# Altium PCB ersa_board_a.PcbDoc
Units mm, origin at the board's own origin, x right, y up, seen from the top; angles counter-clockwise.
Board outline 29 x 106.5 mm, 2 copper layers (Top Layer, Bottom Layer); 46 components, 63 nets, 140 pads, 33 vias.
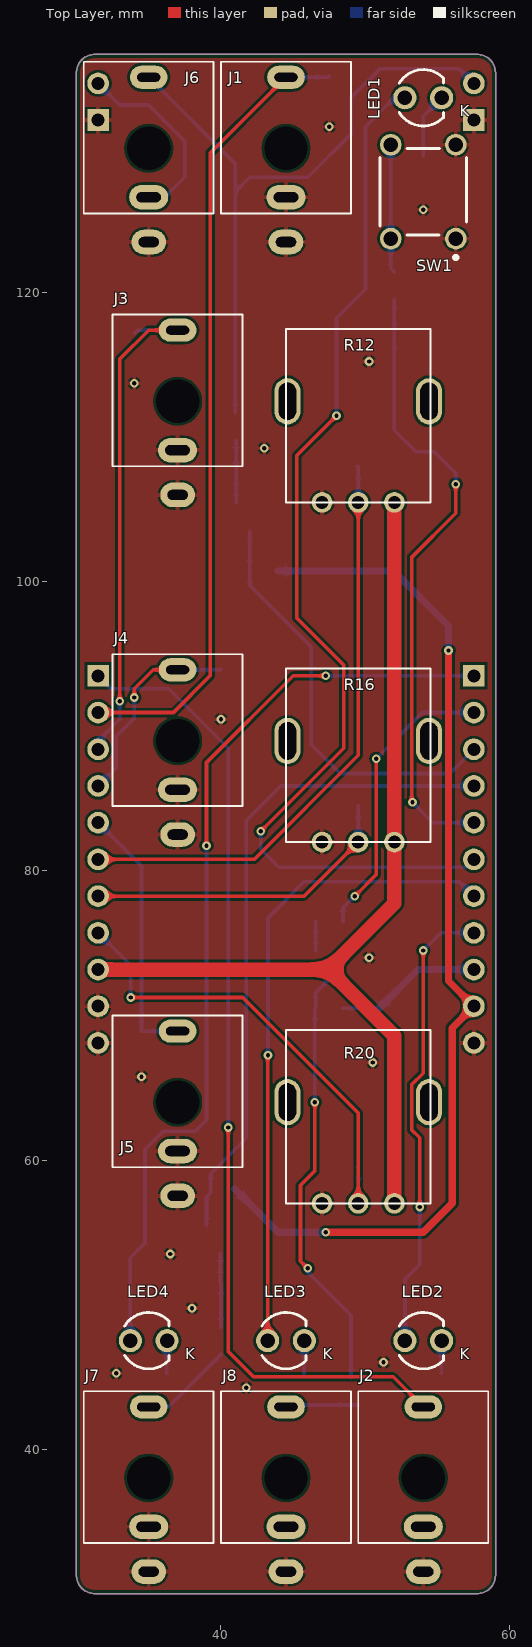
[diagram p0: Top Layer view]
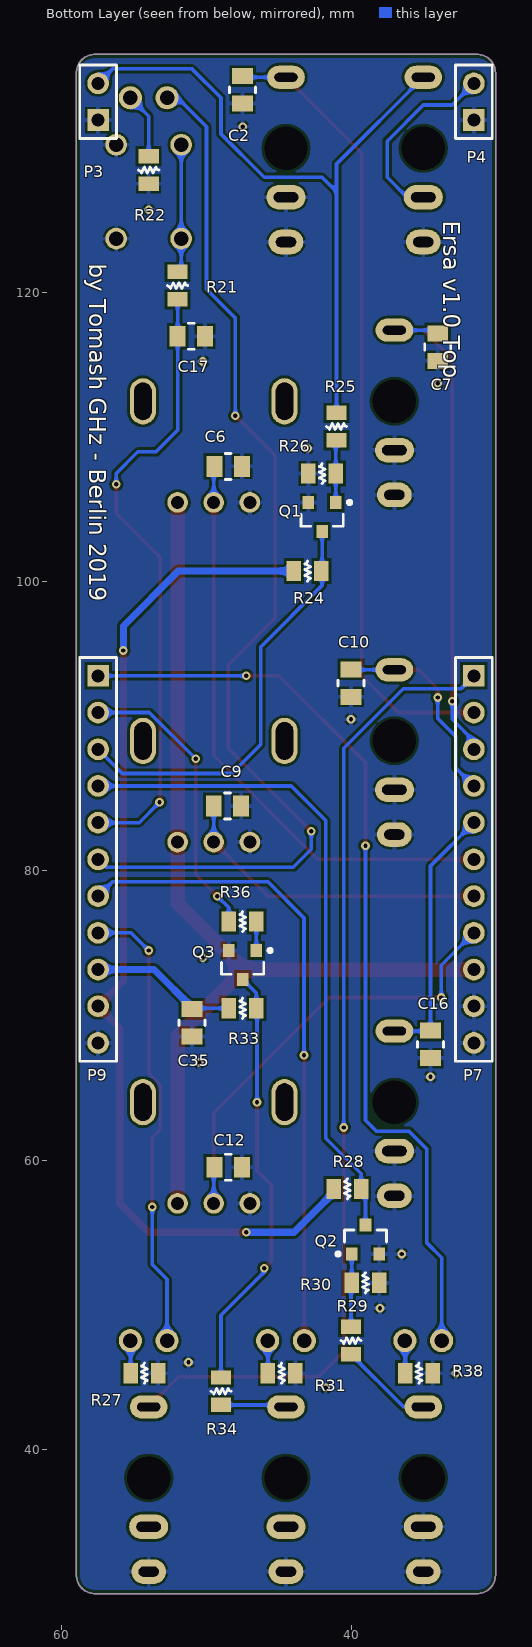
[diagram p1: Bottom Layer view, seen from below]
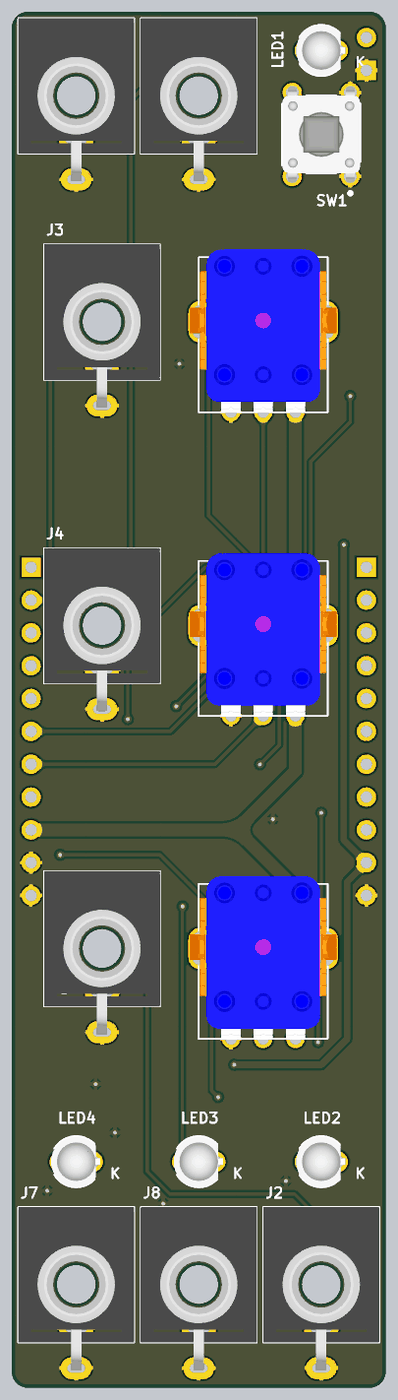
[diagram p2: 3D render of the assembled board from above, using the file's embedded part models]
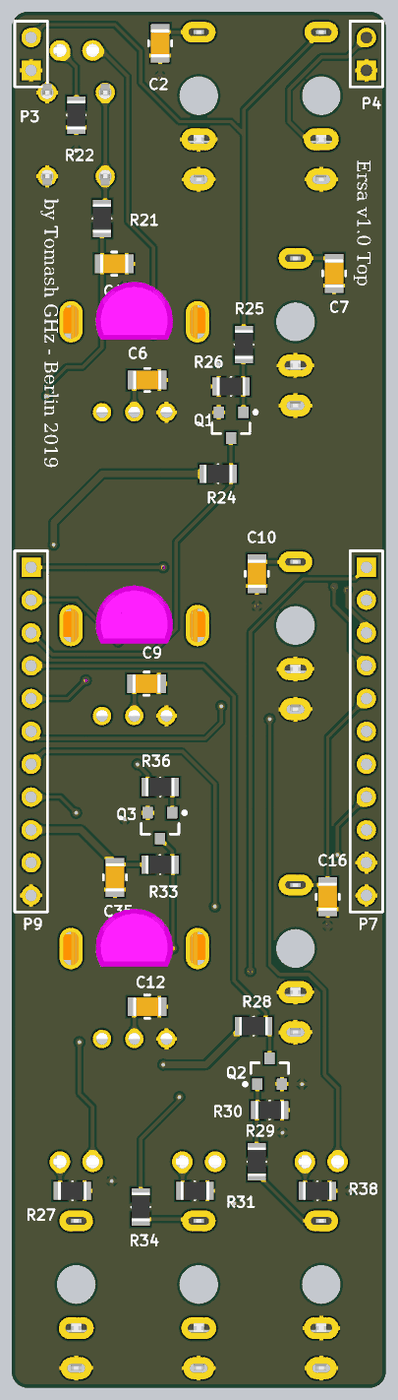
[diagram p3: 3D render of the assembled board from below, using the file's embedded part models]

## Layer stack, top to bottom
Top Solder: solder mask 0.0102, Solder Resist, Dk 3.5
Top Layer: signal copper 0.0356
Dielectric 1: dielectric 0.32, FR-4, Dk 4.8
Bottom Layer: signal copper 0.0356
Bottom Solder: solder mask 0.0102, Solder Resist, Dk 3.5

## Board outline
30,31.27 30,135.23 cw(c31.27,135.23) 31.27,136.5 57.73,136.5 cw(c57.73,135.23) 59,135.23 59,31.27 cw(c57.73,31.27) 57.73,30 31.27,30 cw(c31.27,31.27)

## Design rules (kind name [scope] priority, off if disabled: settings)
BoardOutlineClearance [All] p1: gap=0.254 ignorepadtopadclearanceinfootprint=FALSE except(0: Arc-SplitContinuation Track-SplitContinuation SMDPad-SplitContinuation THPad-SplitContinuation Via-SplitContinuation Fill-SplitContinuation Poly-SplitContinuation Region-SplitContinuation Text-SplitContinuation)
Clearance [All] p1: gap=0.18 ignorepadtopadclearanceinfootprint=FALSE
ComponentClearance [All] p1 off: gap=0.254 collisioncheckmode=3 verticalgap=0.254 showdistances=FALSE
HoleSize [All] p1: absolutevalues=TRUE maxlimit=6.3 minlimit=0.3 maxpercent=80.000 minpercent=20.000
MinimumAnnularRing [All] p1: minimumring=0.15
MinimumSolderMaskSliver [All] p1: minsoldermaskwidth=0.15
PlaneConnect [All] p1: planeconnectstyle=Direct reliefexpansion=0.508 reliefentries=4 reliefconductorwidth=0.254 reliefairgap=0.254
PolygonConnect [All] p1: connectstyle=Relief reliefconductorwidth=0.3 reliefentries=4 polygonreliefangle="90 Angle" airgapwidth=0.15
RoutingVias [All] p1: holewidth=0.3 width=0.6 viastyle="Through Hole" minholewidth=0.3 minwidth=0.6 maxholewidth=0.3 maxwidth=0.6
SilkToSilkClearance [All] p1 off: silktosilkclearance=0.254
SilkToSolderMaskClearance [IsPad] p1 off: minsilkscreentomaskgap=0.254 clearancetoexposedcopper=TRUE
SolderMaskExpansion [All] p1: expansion=0.102
UnConnectedPin [All] p1:
Width [All] p1: maxlimit=1 minlimit=0.15 preferedwidth=0.254
24 further rules are at their usual default settings.

## Classes and differential pairs
component class ersa_schematics_analog: C2 C6 C7 C9 C10 C12 C16 J1 J2 J3 J4 J5 R12 R16 R20
component class ersa_schematics_digital: C17 C35 J6 J7 J8 LED1 LED2 LED3 LED4 P3 P4 P7 P9 Q1 Q2 Q3 R21 R22 R24 R25 R26 R27 R28 R29 R30 R31 R33 R34 R36 R38 SW1

## Components (designator, comment, footprint, x,y, rotation, side; value= is the part's Value field where it differs from the comment)
C2 "20pF" CAPA_0805 47.5,134.05 r90 bottom
C6 "100nF" CAPA_0805 48.5,108 r180 bottom
C7 "20pF" CAPA_0805 34,116.25 r90 bottom
C9 "100nF" CAPA_0805 48.55,84.5 r180 bottom
C10 "20pF" CAPA_0805 40,93 r90 bottom
C12 "100nF" CAPA_0805 48.5,59.5 r180 bottom
C16 "20pF" CAPA_0805 34.5,68 r90 bottom
C17 "100nF" CAPA_0805 51.05,117 r180 bottom
C35 "100nF" CAPA_0805 51,69.5 r270 bottom
J1 "Phonejack2 TN" Thonkiconn 44.5,130 r0 top locked
J2 "Phonejack2 TN" Thonkiconn 54,38 r0 top locked
J3 "Phonejack2 TN" Thonkiconn 37,112.5 r0 top
J4 "Phonejack2 TN" Thonkiconn 37,89 r0 top
J5 "Phonejack2 TN" Thonkiconn 37,64 r0 top
J6 "Phonejack2 TN" Thonkiconn 35,130 r0 top locked
J7 "Phonejack2 TN" Thonkiconn 35,38 r0 top locked
J8 "Phonejack2 TN" Thonkiconn 44.5,38 r0 top locked
LED1 "WP424YDT" "Type 3mm" 54,133.5 r0 top locked
LED2 "WP424YDT" "Type 3mm" 54,47.5 r0 top locked
LED3 "WP424YDT" "Type 3mm" 44.5,47.5 r0 top locked
LED4 "WP424YDT" "Type 3mm" 35,47.5 r0 top locked
P3 "Trig Out" HDR1X2 57.5,131.96 r90 bottom
P4 "Trig In" HDR1X2 31.5,131.96 r90 bottom
P7 "Header 11" HDR1X11 31.5,93.5 r270 bottom locked
P9 "Header 11" HDR1X11 57.5,93.5 r270 bottom locked
Q1 "MMBT3904LT1G" ONSC-SOT-23-3-318-08_V 42,104.501 r270 bottom
Q2 "MMBT3904LT1G" ONSC-SOT-23-3-318-08_V 39,54.499 r90 bottom
Q3 "MMBT3904LT1G" ONSC-SOT-23-3-318-08_V 47.5,73.5 r270 bottom
R12 "Potentiometer" POT-ALPHA 49.5,109 r0 top locked
R16 "Potentiometer" POT-ALPHA 49.5,85.5 r0 top locked
R20 "Potentiometer" POT-ALPHA 49.5,60.5 r0 top locked
R21 "120R" RES_0805 52,120.5 r90 bottom
R22 "120R" RES_0805 54,128.5 r90 bottom
R24 "10k" RES_0805 43,100.75 r180 bottom
R25 "100k" RES_0805 41,110.75 r90 bottom
R26 "1M" RES_0805 42,107.5 r0 bottom
R27 "120R" RES_0805 54.3,45.25 r0 bottom
R28 "10k" RES_0805 40.25,58 r180 bottom
R29 "100k" RES_0805 40,47.5 r270 bottom
R30 "1M" RES_0805 39,51.5 r180 bottom
R31 "120R" RES_0805 44.8,45.25 r0 bottom
R33 "10k" RES_0805 47.5,70.5 r180 bottom
R34 "1k" RES_0805 49,44 r90 bottom
R36 "100k" RES_0805 47.5,76.5 r0 bottom
R38 "120R" RES_0805 35.3,45.25 r0 bottom
SW1 "TL1105SPF160Q" ESWI-TL1105SPF_V 54,127 r90 top locked

## Footprints (in the part's own frame and the unit in brackets; to place one, negate y for a bottom-side part, rotate by r counter-clockwise, add the part's x,y. Pads: shape width x height; smd on the part's side, far side on the other; paste and mask are expansions set on the pad)
CAPA_0805 [mm]
  rect 1.1x1.45 smd: 1(-0.95,0) 2(0.95,0)
  silkscreen extent -0.2,-0.9 0.2,0.9, body extent -1.1,-0.73 1.1,0.72, height 0.5
ESWI-TL1105SPF_V [mm] "THD, 4-Leads, Body 6x6mm"
  round 1.5 hole 1: 1(-3.25,-2.25) 2(3.25,-2.25) 3(-3.25,2.25) 4(3.25,2.25)
  silkscreen extent -4.67,-3 3,3, body extent -3.95,-3 3.95,3, height 7.4
HDR1X2 [mm] "Connector; Header; 2 Position"
  rect 1.5x1.5 hole 0.9: 1(0,0)
  round 1.5 hole 0.9: 2(2.54,0)
  silkscreen extent -1.27,-1.27 3.81,1.27
HDR1X11 [mm] "Connector; Header; 11 Position"
  rect 1.5x1.5 hole 0.9: 1(0,0)
  round 1.5 hole 0.9: 2(2.54,0) 3(5.08,0) 4(7.62,0) 5(10.16,0) 6(12.7,0) 7(15.24,0) 8(17.78,0) 9(20.32,0) 10(22.86,0) 11(25.4,0)
  silkscreen extent -1.27,-1.27 26.67,1.27
ONSC-SOT-23-3-318-08_V [mm] "SOT23, 3-Leads, Body 2.92x1.3mm, Pitch 0.95mm"
  rect 0.9x0.8 smd: 1(-1,0.95) 2(-1,-0.95) 3(1,0)
  silkscreen extent -1.12,-1.46 0.65,2.02, body extent -0.65,-1.46 0.65,1.46, height 1.11
POT-ALPHA [mm] "POT-ALPHA"
  round 1.422 hole 0.9: 1(-2.5,-3.5) 2(0,-3.5) 3(2.5,-3.5)
  oval 1.8x3.2 hole 1.2 slot 2.6 at 90 deg: P$1(-4.9,3.5) P$2(4.9,3.5)
  silkscreen extent -5,-3.5 5,8.5, body extent -5.7,-3.55 5.7,9.1, height 25.3
RES_0805 [mm] "0805 Chip Resistor, 2-Leads, Body 2.05x1.25mm, IPC Medium Density"
  rect 1x1.4 smd: 1(-0.95,0) 2(0.95,0)
  silkscreen extent -0.2,-0.7 0.2,0.7, body extent -1.1,-0.7 1.1,0.7, height 0.5
Thonkiconn [mm] "Thonkiconn (PJ301M-12) 3.5mm Mono Jack"
  round 0 hole 3 unplated: 0(0,0)
  oval 2.6x1.6 hole 0.6 slot 1.6 at 0 deg: 1(0,4.92)
  oval 2.7x1.7 hole 0.7 slot 1.7 at 0 deg: 2(0,-3.38)
  oval 2.4x1.7 hole 0.7 slot 1.4 at 0 deg: 5(0,-6.48)
  silkscreen extent -4.5,-4.5 4.5,5.99, body extent -4.5,-6.63 4.5,6, height 14.5
"Type 3mm" [mm] "THT, LED-3mm, 2pin- Body 4.15mm(max)"
  round 1.6 hole 1: 1(1.27,0) 2(-1.27,0)
  silkscreen extent -1.66,-1.95 1.4,1.95, body extent -1.93,-1.94 1.87,1.94, height 10.5

## Part data
C2 C6 C7 C9 C10 C12 C16 C17 C35: library part Cap, "Capacitor", LatestRevisionDate=17-Jul-2002, LatestRevisionNote="Re-released for DXP Platform.", PackageDescription="Radial Cap, Thru-Hole; 2 Leads; 0.3 in Pin Spacing", PackageReference=RAD-0.3, Published=8-Jun-2000, Publisher="Altium Limited"
J1 J2 J3 J4 J5 J6 J7 J8: "Jack Socket", Manufacturer="Amphenol Audio", Datasheet=http://www.amphenolaudio.com/wp-content/uploads/2015/07/55010544-001-rev-2.pdf, Mouser=http://www.mouser.de/ProductDetail/Amphenol/ACJM-MV35-2S/?qs=%2fha2pyFaduh8uNgKuHZ7oEtHXwcSE0WAH4R1pjDPuhAHZsUXTeJRNg%3d%3d, Part=ACJM-MV35-2S, Thonk=https://www.thonk.co.uk/shop/3-5mm-jacks/
LED1 LED2 LED3 LED4: library part CMP-1488-00001-1, "THT LED round mono-color color lens, WL-TMRC, Bright Green", Emitting color="Bright Green", Manufacturer=Kingbright, ComponentLink1Description="Manufacturer URL", ComponentLink1URL=http://www.we-online.com, ComponentLink2Description=Datasheet, ComponentLink2URL=http://katalog.we-online.de/pbs/datasheet/7448042001.pdfhttp://katalog.we-online.de/pbs/datasheet/7448042001.pdfhttp://katalog.we-online.de/pbs/datasheet/7448042001.pdfhttp://katalog.we-online.de/pbs/datasheet/151031VS04000.pdf, PackageReference="Type 3mm", PartNumber=WP424YDT
P3 P4: library part "Header 2", "Header, 2-Pin", LatestRevisionDate=17-Jul-2002, LatestRevisionNote="Re-released for DXP Platform.", Publisher="Altium Limited"
P7 P9: "Header, 11-Pin", LatestRevisionDate=17-Jul-2002, LatestRevisionNote="Re-released for DXP Platform.", Publisher="Altium Limited"
Q1 Q2 Q3: library part CMP-1048-00631-1, "General Purpose Transistor, NPN Silicon, 3-Pin SOT-23, Pb-Free, Tape and Reel", Manufacturer="On Semiconductor", ComponentLink1Description="Manufacturer URL", ComponentLink1URL=http://www.onsemi.com/, ComponentLink2Description=Datasheet, ComponentLink2URL=http://www.onsemi.cn/pub_link/Collateral/MMBT3904LT1-D.PDF, ComponentLink3Description="Package Specification", ComponentLink3URL=http://www.onsemi.cn/pub_link/Collateral/318-08.PDF, DatasheetVersion="Rev. 12", fT Min (MHz)=300, IC Continuous (A)=0.2, Mounting Technology="Surface Mount", PackageDescription="3-Pin Small Outline Transistor, Body 2.92 x 1.3 mm, Pitch 0.95 mm", PackageReference=SOT-23-3-318-08, PackageVersion="Rev. AP, 11/2009", Packing="Tape and Reel", PartNumber=MMBT3904LT1G, Polarity=NPN, RoHS=TRUE
R12 R16 R20: PartNumber=PTV09A-4020U-B104, Mouser=http://www.mouser.de/Search/ProductDetail.aspx?R=PTV09A-4020U-B104virtualkey65210000virtualkey652-PTV09A4020U-B104
R21 R22 R27 R31 R38: library part Resistor, "120R 0805", Manufacturer=Susumu, PartNumber=RR1220P-105-D, Mouser=http://www.mouser.de/ProductDetail/Susumu/RR1220P-105-D/?qs=sGAEpiMZZMu61qfTUdNhG%2fDhcyQpRg8MxiYDTLm9lx4%3d
R24 R28 R33: library part Resistor, "10k 0805", Manufacturer=Susumu, PartNumber=RR1220P-105-D, Mouser=http://www.mouser.de/ProductDetail/Susumu/RR1220P-105-D/?qs=sGAEpiMZZMu61qfTUdNhG%2fDhcyQpRg8MxiYDTLm9lx4%3d
R25 R29 R36: library part Resistor, "100k 0805", Manufacturer=Susumu, PartNumber=RR1220P-105-D, Mouser=http://www.mouser.de/ProductDetail/Susumu/RR1220P-105-D/?qs=sGAEpiMZZMu61qfTUdNhG%2fDhcyQpRg8MxiYDTLm9lx4%3d
R26 R30: library part Resistor, "1M 0805", Manufacturer=Susumu, PartNumber=RR1220P-105-D, Mouser=http://www.mouser.de/ProductDetail/Susumu/RR1220P-105-D/?qs=sGAEpiMZZMu61qfTUdNhG%2fDhcyQpRg8MxiYDTLm9lx4%3d
R34: library part Resistor, "1k 0805", Manufacturer=Susumu, PartNumber=RR1220P-105-D, Mouser=http://www.mouser.de/ProductDetail/Susumu/RR1220P-105-D/?qs=sGAEpiMZZMu61qfTUdNhG%2fDhcyQpRg8MxiYDTLm9lx4%3d
SW1: library part CMP-2000-07248-1, "Tact Switch, SPST-NO, 50 mA, 12 VDC, -20 to 70 degC, 4-Pin THD, RoHS, Bulk", Manufacturer=E-Switch, Package Description="4-Pin Through Hole Device, Body 6 x 6 mm", Package Reference=TL1105SPF, Actuation Force=1.6N, Actuator Style=RoundButton, Contact Material=Silver, Datasheet URL=https://www.e-switch.com/system/asset/product_line/data_sheet/140/TL1105.pdf, Datasheet Version=12/2013, Manufacturer URL=http://www.e-switch.ch/en/, Mounting Technology=ThroughHole, Package URL=http://spec_sheets.e-switch.com/specs/P010201.pdf, Size=6x6mm, Termination Style=RightAngle

## Via types
v1: diameter 0.6, hole 0.3, Top Layer to Bottom Layer, tented both sides, 33 vias

## Nets (pads, with @x,y where several pads share a name; then routed paths per layer and width w, separated by ;. In a path a pad name is that pad's centre, name@x,y a point inside that pad or via, vN(x,y) a via of type N, cw(c..) or ccw(c..) an arc to the next point about the centre after c; other vN are vias at no path point)
3V3: P9.10 R24.1 R28.1 | length 71.8
  Top Layer w0.5: v1(47.25,55) 54,55 56,57 56,69.14 P9.10 55.75,72.39 v1(55.75,95.25)
  Bottom Layer w0.5: R28.1@40.95,58 43.95,55 v1(47.25,55) ; R24.1 51.95,100.75 55.75,96.95 v1(55.75,95.25)
3V3A: P7.9 R12.3 R16.3 R20.3 | length 68.2
  Top Layer w1: P7.9 47.43,73.18 ; R20.3 52,68.61 47.43,73.18 ; R12.3 R16.3 52,77.75 47.43,73.18
AREF_-10: 
CV_FALL: 
CV_IN: 
CV_RISE: 
CV_SLOPE: 
CYC_LED: LED1.2 P9.6 | length 74.7
  Top Layer w0.254: v1(42.75,82.75) 48.5,88.5 48.5,94.25 45.25,97.5 45.25,108.75 v1(48,111.5)
  Bottom Layer w0.254: v1(42.75,82.75) 42.75,81.5 44,80.25 56.95,80.25 P9.6 ; v1(48,111.5) 48,118.25 50,120.25 50,131.5 52,133.5 LED1.2
DAC: 
EOC: P9.2 R36.2 | length 20.3
  Top Layer w0.254: v1(49.25,78.25) 50.75,79.75 v1(50.75,87.757)
  Bottom Layer w0.254: R36.2 48.45,77.45 v1(49.25,78.25) ; v1(50.75,87.757) 53.953,90.96 P9.2
EOC_LED: LED3.2 P9.7 | length 45
  Top Layer w0.254: LED3.2 43.23,67.23 v1(43.25,67.25)
  Bottom Layer w0.254: v1(43.25,67.25) 43.25,76.75 45.75,79.25 56.51,79.25 P9.7
GND: C2.1 C6.2 C7.1 C9.2 C10.1 C12.2 C16.1 C17.2 C35.2 J1.2 J1.5 J2.5 J3.2 J3.5 J4.2 J4.5 J5.2 J5.5 J6.5 J7.2 J7.5 J8.5 P3.1 P4.1 P7.10 P7.11 P9.11 Q1.2 Q2.2 Q3.2 R12.1 R16.1 R20.1 R22.1 R26.2 R27.1 R30.2 R31.1 R38.1 SW1.1 SW1.2
  other v1: 41.75,44.25 32.75,45.25 51.25,46 38,49.75 36.5,53.5 34.5,65.75 50.5,66.75 50.25,74 40,90.5 43,109.25 34,113.75 50.25,115.25 54,125.75 47.5,131.5
GNDA: 
HOLD: P9.4 Q2.3 R28.2 | length 45.9
  Bottom Layer w0.254: Q2.3 39,57.45 39.3,57.75 R28.2 39.3,59.05 41.75,61.5 41.75,83.5 44.13,85.88 P9.4
HOLD_LED: LED4.2 P9.1 | length 64.5
  Top Layer w0.254: v1(39,81.75) 39,87.5 45,93.5 v1(47.25,93.5)
  Bottom Layer w0.254: LED4.2 33.73,53.23 34.75,54.25 34.75,60.75 36,62 38.25,62 39,62.75 v1(39,81.75) ; v1(47.25,93.5) P9.1
NetC1_1: 
NetC3_1: 
NetC3_2: 
NetC4_1: 
NetC5_2: 
NetC8_1: 
NetC11_1: 
NetC19_1: 
NetC20_1: 
NetC24_1: 
NetD1_1: 
NetD2_1: 
NetD2_2: 
NetJ6_1: J6.1 P3.2 R25.2 | length 47.6
  Bottom Layer w0.254: J6.1 41,128.92 41,127 ; R25.2 41,127 ; P3.2 56.5,135.5 51,135.5 49,133.5 49,131 46,128 42,128 41,127
NetJ6_2: J6.2 P4.2 | length 13.2
  Bottom Layer w0.254: P4.2 33,133 35,133 37.5,130.5 37.5,128 36.12,126.62 J6.2
NetJ7_1: J7.1 R29.2 | length 6.5
  Bottom Layer w0.254: J7.1 36.37,42.92 R29.2
NetJ8_1: J8.1 R34.1 | length 5.1
  Bottom Layer w0.254: J8.1 44.63,43.05 R34.1 R34.1@49.5,43.05
NetLED1_1: LED1.1 R22.2 | length 4.6
  Bottom Layer w0.254: R22.2 54,132.23 LED1.1
NetLED2_1: LED2.1 R27.2 | length 2.3
  Bottom Layer w0.254: R27.2 55.25,47.48 LED2.1
NetLED3_1: LED3.1 R31.2 | length 2.3
  Bottom Layer w0.254: R31.2 45.75,47.48 LED3.1
NetLED4_1: LED4.1 R38.2 | length 2.3
  Bottom Layer w0.254: R38.2 36.25,47.48 LED4.1
NetQ1_1: Q1.1 R25.1 R26.1 | length 4.3
  Bottom Layer w0.254: R25.1 41.05,109.75 R26.1 Q1.1
NetQ2_1: Q2.1 R29.1 R30.1 | length 5.1
  Bottom Layer w0.254: Q2.1 R30.1 40,51.45 R29.1
NetQ3_1: Q3.1 R36.1 | length 2
  Bottom Layer w0.254: Q3.1 R36.1
NetQ3_3: Q3.3 R33.2 R34.2 | length 29.8
  Top Layer w0.254: v1(46,52.5) 45.5,53 45.5,58.25 46.5,59.25 v1(46.5,64)
  Bottom Layer w0.254: v1(46,52.5) 46,52.25 49,49.25 R34.2 ; v1(46.5,64) 46.5,70.45 R33.2 46.55,71.55 Q3.3
NetR4_1: 
NetR5_1: 
NetR21_2: R21.2 SW1.3 SW1.4 | length 8.9
  Bottom Layer w0.254: SW1.4 SW1.3 51.75,121.7 R21.2
NetR23_1: 
NetR32_1: 
NRST: 
OUT_LED: LED2.2 P9.8 | length 32
  Top Layer w0.254: v1(53.75,56.75) 53.75,61.536 53.193,62.093 53.193,65.2 54,66.007 v1(54,74.5)
  Bottom Layer w0.254: LED2.2 52.73,51.75 53.75,52.77 v1(53.75,56.75) ; v1(54,74.5) 55.22,75.72 P9.8
OUTPUT: J2.1 P7.1 | length 67.9
  Top Layer w0.254: v1(40.5,62.25) 40.5,46.75 42.25,45 51.92,45 J2.1
  Bottom Layer w0.254: P7.1 32.393,92.607 36.393,92.607 40.5,88.5 v1(40.5,62.25)
POT_FALL: C9.1 P7.7 R16.2 | length 22
  Top Layer w0.254: P7.7 45.76,78.26 R16.2
  Bottom Layer w0.254: R16.2 C9.1
POT_RISE: C6.1 P7.6 R12.2 | length 41
  Top Layer w0.254: P7.6 42.3,80.8 49.5,88 R12.2
  Bottom Layer w0.254: C6.1 49.5,107.95 R12.2
POT_SLOPE: C12.1 P7.8 R20.2 | length 33.2
  Top Layer w0.254: v1(33.75,71.25) 41.5,71.25 49.5,63.25 R20.2
  Bottom Layer w0.254: P7.8 33.75,73.47 v1(33.75,71.25) ; C12.1 49.5,59.45 R20.2
R_CV_FALL: C10.2 J4.1 P7.4 | length 14.3
  Top Layer w0.254: v1(34,92) 34,92.607 35.313,93.92 J4.1
  Bottom Layer w0.254: P7.4 32.75,87.13 32.75,89.305 34,90.555 v1(34,92) ; J4.1 39.97,93.92 C10.2
R_CV_IN: C2.2 J1.1 P7.2 | length 55.4
  Top Layer w0.254: P7.2 36.71,90.96 39.25,93.5 39.25,129.67 J1.1
  Bottom Layer w0.254: J1.1 47.42,134.92 C2.2
R_CV_RISE: C7.2 J3.1 P7.3 | length 35.5
  Top Layer w0.254: v1(33,91.75) 33,115.42 35,117.42 J3.1
  Bottom Layer w0.254: P7.3 31.5,89 33,90.5 v1(33,91.75) ; C7.2 34.22,117.42 J3.1
R_CV_SLOPE: C16.2 J5.1 P7.5 | length 19.2
  Bottom Layer w0.254: P7.5 34.5,80.34 C16.2 34.5,68.92 J5.1 37.97,68.92 J5.1@38,68.95
RX: 
SW_A: C17.1 P9.5 R21.1 | length 43.4
  Top Layer w0.254: v1(53.25,84.75) 53.193,84.807 53.193,101.693 56.25,104.75 v1(56.25,106.75)
  Bottom Layer w0.254: R21.1 C17.1 52,110.5 53.5,109 54.75,109 56.25,107.5 v1(56.25,106.75) ; v1(53.25,84.75) 54.66,83.34 P9.5
SWCLK: 
SWDIO: 
TRIGGER: P9.3 Q1.3 R24.2 | length 29.3
  Bottom Layer w0.254: Q1.3 42,99.75 46.25,95.5 46.25,88.75 48.25,86.75 55.83,86.75 P9.3
TX: 
VCC: C35.1 P9.9 R33.1 | length 10.2
  Bottom Layer w0.254: R33.1 50.95,70.5 C35.1
  Bottom Layer w0.5: C35.1@50.95,70.5 53.63,73.18 P9.9
VEE: 
pads on no net: J1.0 J2.0 J2.2 J3.0 J4.0 J5.0 J6.0 J7.0 J8.0 J8.2 R12.P$1 R12.P$2 R16.P$1 R16.P$2 R20.P$1 R20.P$2

## Polygon pours and split planes (outlines as drawn)
GND on Top Layer "GND_L01_P002" (solid, remove dead copper, pour order 2): 30,30 59,30 59,136.5 30,136.5
GND on Bottom Layer "GND_L02_P000" (solid, remove dead copper, pour order 0): 30,30 59,30 59,136.5 30,136.5

## Keep-outs
Keep-Out Layer:
  lines w0.1: 30,31.27 ccw(c31.27,31.27) 31.27,30 35,30 57.73,30 ccw(c57.73,31.27) 59,31.27 59,41 59,135.23 ccw(c57.73,135.23) 57.73,136.5 49.5,136.5 31.27,136.5 ccw(c31.27,135.23) 30,135.23 30,120.5 30,31.27

## Silkscreen, mask and mechanical layers (free items; w line width, h text height)
Bottom Overlay:
  text "Ersa v1.0 Top" at 34,125 h2 r90
  text "by Tomash GHz - Berlin 2019" at 58.5,122 h2 r90
Drill Drawing:
  lines w0.1: 30,31.27 ccw(c31.27,31.27) 31.27,30 35,30 57.73,30 ccw(c57.73,31.27) 59,31.27 59,41 59,135.23 ccw(c57.73,135.23) 57.73,136.5 49.5,136.5 31.27,136.5 ccw(c31.27,135.23) 30,135.23 30,120.5 30,31.27

## Dimensions
30,31.27 to 59,31.27 on Mechanical 1
35,30 to 31.27,136.5 on Mechanical 1

## Text inside footprints (layer, text, board x,y; h text height)
LED1: Top Overlay "K" at 56.54,132.23 h0.76; Mechanical 15 "K" at 56.54,132.23 h0.76
LED2: Top Overlay "K" at 56.54,46.23 h0.76; Mechanical 15 "K" at 56.54,46.23 h0.76
LED3: Top Overlay "K" at 47.04,46.23 h0.76; Mechanical 15 "K" at 47.04,46.23 h0.76
LED4: Top Overlay "K" at 37.54,46.23 h0.76; Mechanical 15 "K" at 37.54,46.23 h0.76